# Altium PCB PCB1.PcbDoc
Units mm, origin at the board's own origin, x right, y up, seen from the top; angles counter-clockwise.
Board outline 106.05 x 64.9 mm, 2 copper layers (Top Layer, Bottom Layer); 11 components, 11 nets, 61 pads, 0 vias.
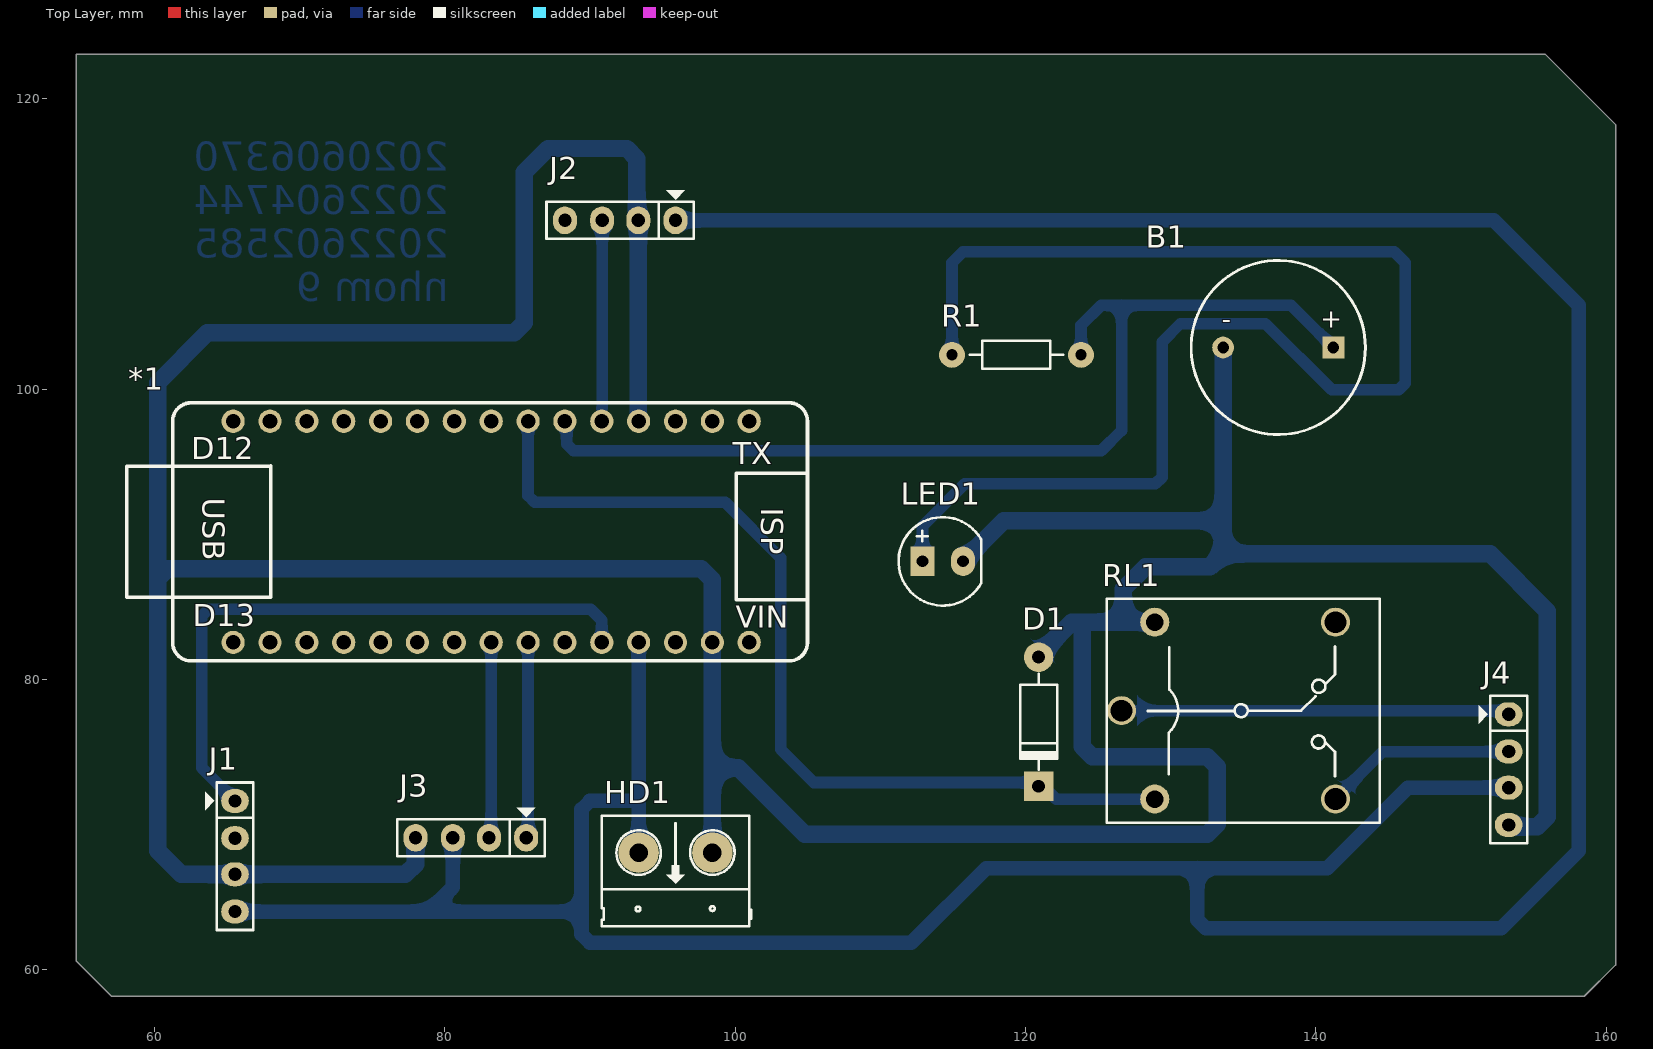
[diagram p0: Top Layer view]
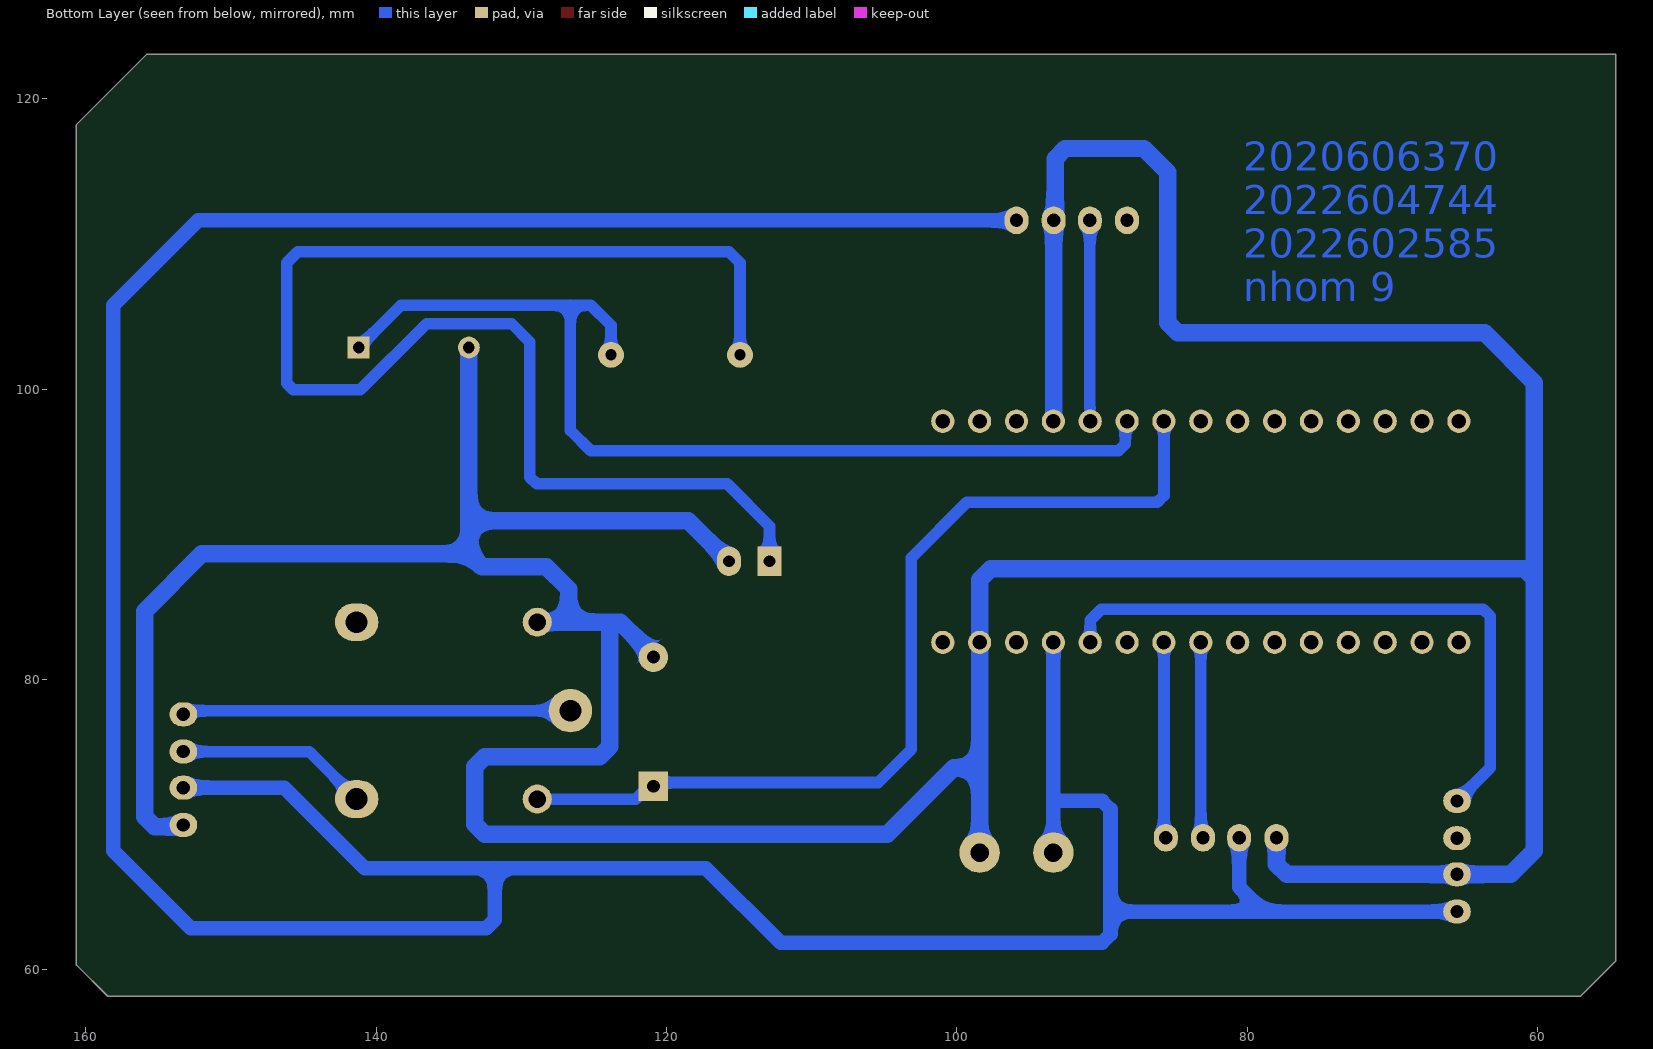
[diagram p1: Bottom Layer view, seen from below]
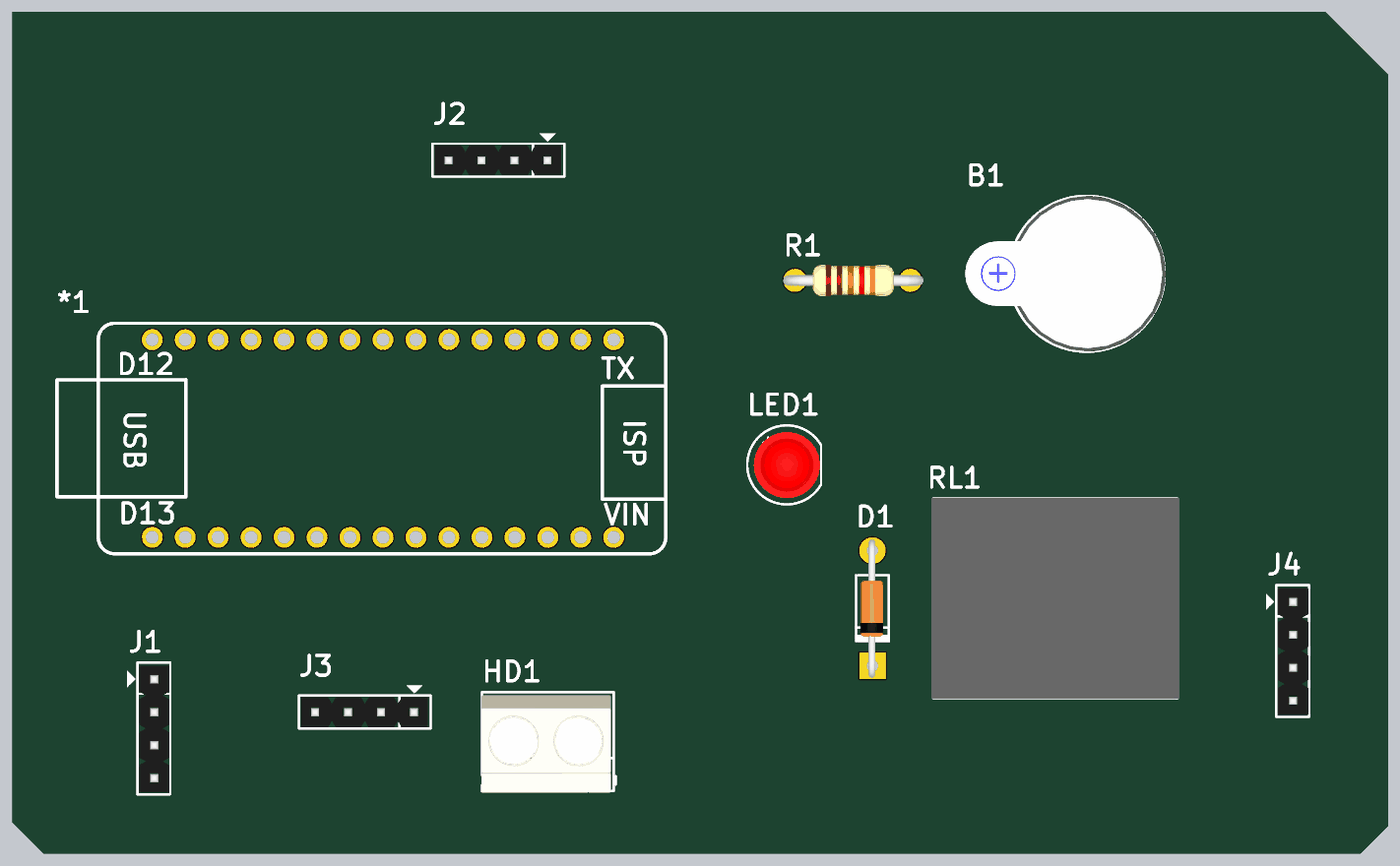
[diagram p2: 3D render of the assembled board from above, using the file's embedded part models]

## Layer stack, top to bottom
Top Solder: solder mask 0.0102, Solder Resist, Dk 3.5
Top Layer: signal copper 0.0356
Dielectric 1: dielectric 0.32, FR-4, Dk 4.8
Bottom Layer: signal copper 0.0356
Bottom Solder: solder mask 0.0102, Solder Resist, Dk 3.5

## Board outline
57.023,58.166 54.61,60.579 54.61,123.063 155.829,123.063 160.655,118.237 160.655,60.325 158.496,58.166

## Design rules (kind name [scope] priority, off if disabled: settings)
Clearance [All] p1: gap=0.254 ignorepadtopadclearanceinfootprint=FALSE except(0: Arc-Hole Track-Hole SMDPad-Hole THPad-Hole Via-Hole Fill-Hole Poly-Hole Region-Hole Text-Hole)
PolygonConnect [All] p1: connectstyle=Relief reliefconductorwidth=0.254 reliefentries=4 polygonreliefangle="90 Angle" airgapwidth=0.254
RoomDefinition Sheet1 [InComponentClass('Sheet1')] p1: confinementstyle=ConfineIn formatcopy=TRUE lockcomponents=FALSE outline 0,0 50.8,0 50.8,25.4 0,25.4
RoutingVias [All] p1: holewidth=0.711 width=1.35 viastyle="Through Hole" minholewidth=0.711 minwidth=1.35 maxholewidth=0.711 maxwidth=1.35
SolderMaskExpansion [All] p1: expansion=0.102 istentingtop=FALSE
Width VCC [InNet('VCC')] p1: maxlimit=1 minlimit=1 preferedwidth=1
Width GND [InNet('GND')] p2: maxlimit=1.2 minlimit=1.2 preferedwidth=1.2
Width NET [All] p3: maxlimit=0.8 minlimit=0.8 preferedwidth=0.8
30 further rules are at their usual default settings.

## Components (designator, comment, footprint, x,y, rotation, side; value= is the part's Value field where it differs from the comment)
*1 "UNO Nano" "UNO Nano" 100.965,97.79 r270 top
B1 "Buzzer" Buzzer 137.414,102.87 r180 top
D1 "1N4007" D1A 120.904,81.534 r90 top
HD1 "Header 2" HED2 98.425,68.072 r180 top
J1 "Jumper 4" JP4 65.532,69.088 r270 top value=J3
J2 "Jumper 4" JP4 93.345,111.633 r180 top value=J3
J3 "Jumper 4" JP4 83.058,69.088 r180 top value=J3
J4 "Jumper 4" JP4 153.289,75.057 r270 top value=J3
LED1 "LED" LED-5 114.3,88.138 r0 top value="LED 3 ly Single Colour"
R1 "1k" R1/4W 123.825,102.362 r180 top value="R1/4W - 1K"
RL1 "Relay" RL_SPDT_10A 126.619,77.851 r0 top value="Relay SPDT, 10A, 12V"

## Footprints (in the part's own frame and the unit in brackets; to place one, negate y for a bottom-side part, rotate by r counter-clockwise, add the part's x,y. Pads: shape width x height; smd on the part's side, far side on the other; paste and mask are expansions set on the pad)
Buzzer [mm] "2PIN, 3.5mm pitch, 0.8mm pin width"
  rect 1.5x1.5 hole 0.8: 1(-3.8,0)
  round 1.5 hole 0.8: 2(3.8,0)
  silkscreen extent -6,-6 6,6, body extent -6.08,-6.01 9.37,5.99, height 9.65
D1A [mil] "Diode 1A, W 100mil, L 350mil"
  round 80 hole 35: 1(0,0)
  rect 80x80 hole 35: 2(-350,0)
  silkscreen extent -305,-50 -45,50, body extent -386,-33 34,36, height 84
HED2 [mil] "Header 2, 2 pin, hight 300mil, Pin to Pin 200, Colour Green"
  round 110 hole 50: 1(0,0) 2(200,0)
  silkscreen extent -106,-100 300,200, body extent -92,-90 302,205, height 394
JP4 [mil] "Jumper 4"
  oval 65x75 hole 36: 1(-100,0) 2(1,0) 3(99,0) 4(200,0)
  silkscreen extent -150,-81 250,50, body extent -141,-45 243,47, height 320
LED-5 [mil] "LED 2 PIN, 5 ly , Only colour, pin to pin 110mil"
  rect 65x80 hole 32: 1(-55,0)
  oval 65x80 hole 32: 2(55,0)
  silkscreen extent -120,-120 104,120, body extent -100,-101 101,100, height 339
R1/4W [mil] "R 1/4W, 2 Pin, 350mil"
  round 70 hole 31: 1(0,0) 2(350,0)
  silkscreen extent 48,-38 302,38, body extent -40,-47 386,47, height 111
RL_SPDT_10A [mm] "Relay SPDT, 5 pin, 10A,W 650mil, L 800mil, H 800mil"
  round 2 / inner round 3 / far side round 3 hole 1.5: 1(0,0)
  round 2 / inner round 3 / far side oval 3x2.6 hole 1.5: 2(14.732,6.096) 3(14.732,-6.096)
  round 2 hole 1.2: 4(2.286,-6.096) 5(2.286,6.096)
  silkscreen extent -1.02,-7.72 17.78,7.7, body extent -1.17,-7.78 17.93,7.72, height 15.2
"UNO Nano" [mm] "PCB For Uno Nano"
  round 1.6 hole 1: 1(0,0) 2(0,-2.54) 3(0,-5.08) 4(0,-7.62) 5(0,-10.16) 6(0,-12.7) 7(0,-15.24) 8(0,-17.78) 9(0,-20.32) 10(0,-22.86) 11(0,-25.4) 12(0,-27.94) 13(0,-30.48) 14(0,-33.02) 15(0,-35.56) 16(15.24,-35.56) 17(15.24,-33.02) 18(15.24,-30.48) 19(15.24,-27.94) 20(15.24,-25.4) 21(15.24,-22.86) 22(15.24,-20.32) 23(15.24,-17.78) 24(15.24,-15.24) 25(15.24,-12.7) 26(15.24,-10.16) 27(15.24,-7.62) 28(15.24,-5.08) 29(15.24,-2.54) 30(15.24,0)
  silkscreen extent -1.27,-42.9 16.51,4.01

## Part data
D1: library part D1A, "Diode 1A"
HD1: library part Hed2, "Header 2 (Green)"
J1 J2 J3 J4: library part JP4
LED1: "LED Single colour Green and Red"
R1: library part R1/4W, "Resistor 1/4W"
RL1: library part "Relay 1", "Relay SPDT 5 Pin"

## Nets (pads, with @x,y where several pads share a name; then routed paths per layer and width w, separated by ;. In a path a pad name is that pad's centre, name@x,y a point inside that pad or via, vN(x,y) a via of type N, cw(c..) or ccw(c..) an arc to the next point about the centre after c; other vN are vias at no path point)
bazzer: *1.6 B1.1 R1.1 | length 70.5
  Bottom Layer w0.8: *1.6 88.392,97.663 88.392,96.227 88.861,95.758 125.222,95.758 126.619,97.155 126.619,105.791 ; R1.1 123.825,104.394 125.222,105.791 126.619,105.791 ; B1.1 138.293,105.791 126.619,105.791
Flame: *1.5 J2.3 | length 13
  Bottom Layer w0.8: 90.805,98.679 90.83,98.704 J2.3
gas: *1.26 J1.1 | length 43.3
  Bottom Layer w0.8: J1.1 63.246,73.914 63.246,84.367 63.715,84.836 90.043,84.836 90.805,84.074 *1.26
GND: *1.4 *1.29 B1.2 D1.1 HD1.1 J1.3 J2.2 J3.4 J4.4 LED1.2 RL1.5 | length 327.4
  Bottom Layer w1.2: J3.4 77.978,67.276 77.275,66.573 J1.3 61.824,66.573 60.198,68.199 60.198,86.927 ; *1.4 93.32,97.815 J2.2 93.233,111.719 93.233,112.165 93.218,112.181 93.218,115.883 92.515,116.586 87.122,116.586 85.471,114.935 85.471,104.589 84.768,103.886 63.627,103.886 60.198,100.457 60.198,86.927 ; HD1.1 98.425,73.914 ; LED1.2 115.697,88.206 116.045,88.554 116.113,88.554 118.491,90.932 133.614,90.932 ; D1.1@121.031,81.788 123.19,83.947 123.903,83.947 ; RL1.5 126.746,83.947 ; B1.2 133.614,90.932 ; J4.4 153.375,69.891 153.821,69.891 153.862,69.85 155.253,69.85 155.956,70.553 155.956,84.709 152.009,88.656 133.614,88.656 ; 60.198,86.927 60.901,87.63 97.663,87.63 98.425,86.868 *1.29 98.425,73.914 ; 98.425,73.914 100.203,73.914 104.791,69.326 132.52,69.326 133.223,70.029 133.223,73.973 132.52,74.676 124.606,74.676 123.903,75.379 123.903,83.947 ; 123.903,83.947 126.746,83.947 ; 126.746,83.947 126.746,86.233 128.27,87.757 132.715,87.757 133.614,88.656 ; 133.614,88.656 133.614,90.932
NetJ4_1: J4.1 RL1.1 | length 26.8
  Bottom Layer w0.8: RL1.1 152.678,77.851 152.932,77.597 J4.1
NetJ4_2: J4.2 RL1.3 | length 13.3
  Bottom Layer w0.8: RL1.3 144.628,75.032 J4.2
NetLED1_1: LED1.1 R1.2 | length 95.5
  Bottom Layer w0.8: LED1.1 112.903,90.551 115.824,93.472 128.944,93.472 129.413,93.941 129.413,103.251 130.683,104.521 136.525,104.521 141.097,99.949 145.708,99.949 146.177,100.418 146.177,108.712 145.415,109.474 115.697,109.474 114.935,108.712 R1.2
relay: *1.7 D1.2 RL1.4 | length 64.7
  Bottom Layer w0.8: *1.7 85.725,92.671 86.194,92.202 99.314,92.202 103.124,88.392 103.124,75.184 105.41,72.898 121.031,72.898 121.031,72.84 122.116,71.755 RL1.4
SCL: *1.24 J3.1 | length 13.5
  Bottom Layer w0.8: J3.1 85.725,69.215 *1.24
SDA: *1.23 J3.2 | length 13.5
  Bottom Layer w0.8: J3.2 83.185,69.24 *1.23
VCC: *1.27 HD1.2 J1.4 J2.1 J3.3 J4.3 | length 260.1
  Bottom Layer w1: J1.4 78.867,64.008 ; J3.3 80.543,65.684 78.867,64.008 ; HD1.2 93.345,71.374 ; *1.27 93.345,71.374 ; J2.1 152.273,111.633 158.115,105.791 158.115,68.199 152.781,62.865 132.412,62.865 131.826,63.451 131.826,67.005 ; J4.3 146.329,72.542 140.792,67.005 131.826,67.005 ; 78.867,64.008 89.408,64.008 ; 89.408,64.008 89.408,71.042 89.994,71.628 93.091,71.628 93.345,71.374 ; 89.408,64.008 89.408,62.435 89.994,61.849 112.141,61.849 117.297,67.005 131.826,67.005
pads on no net: *1.1 *1.2 *1.3 *1.8 *1.9 *1.10 *1.11 *1.12 *1.13 *1.14 *1.15 *1.16 *1.17 *1.18 *1.19 *1.20 *1.21 *1.22 *1.25 *1.28 *1.30 J1.2 J2.4 RL1.2
copper on no net: | length 0.2
  Bottom Layer w0.7: 100.813,82.398 100.965,82.55

## Other copper
Bottom Layer:
  text "2020606370 / 2022604744 / 2022602585 / nhom 9" at 80.264,106.045 h2

## Silkscreen, mask and mechanical layers (free items; w line width, h text height)
Mechanical 1:
  the board outline again, w0.254

## Text inside footprints (layer, text, board x,y; h text height)
*1: Top Overlay "ISP" at 101.803,91.821 h1.52 r270; Top Overlay "USB" at 63.297,92.507 h1.52 r270; Top Overlay "TX" at 99.822,94.844 h1.52; Top Overlay "VIN" at 100.025,83.566 h1.52; Top Overlay "D12" at 62.509,95.174 h1.52; Top Overlay "D13" at 62.636,83.668 h1.52
B1: Top Overlay "+" at 141.814,105.32 h1.3 r180; Top Overlay "-" at 134.164,105.17 h1.3 r180